# Altium PCB Copy of gateway2.PcbDoc
Units mil, origin at the board's own origin, x right, y up, seen from the top; angles counter-clockwise.
Board outline 6000 x 4000 mil, 2 copper layers (Top Layer, Bottom Layer); 21 components, 59 nets, 200 pads, 23 vias.
Unrouted connection lines stored in the file: 15.
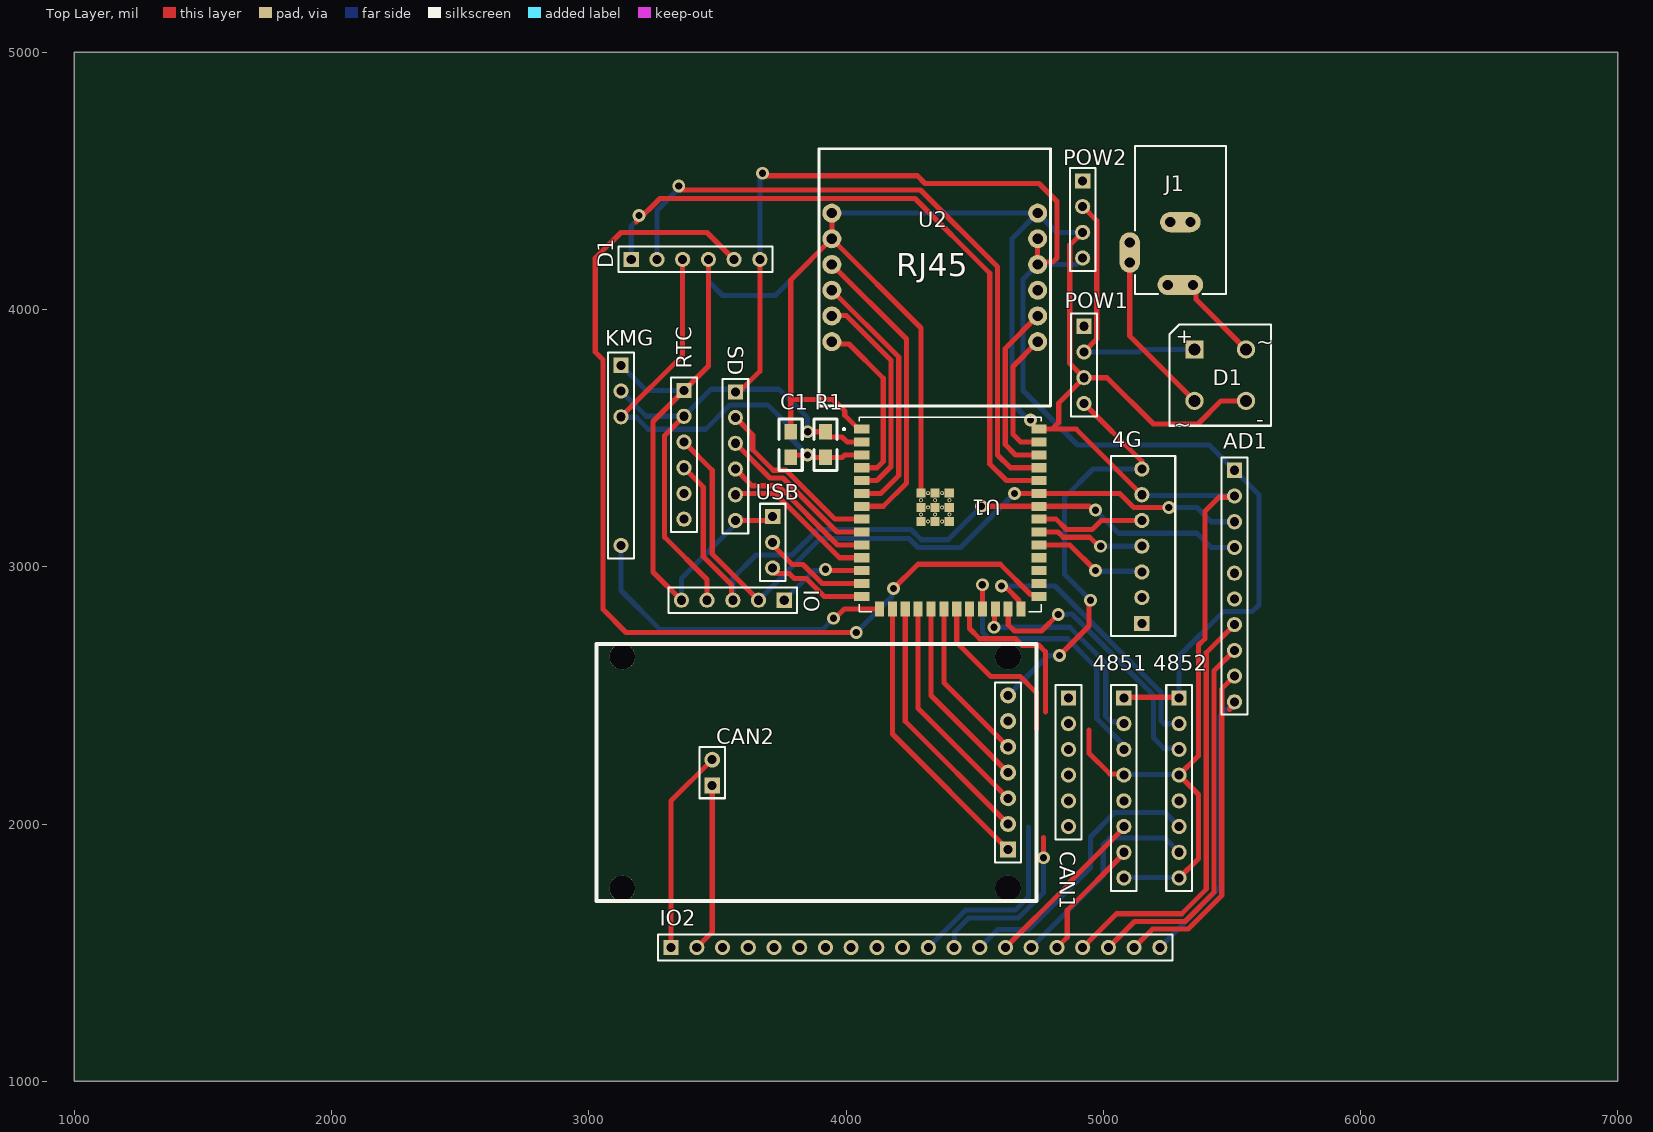
[diagram p0: Top Layer view]
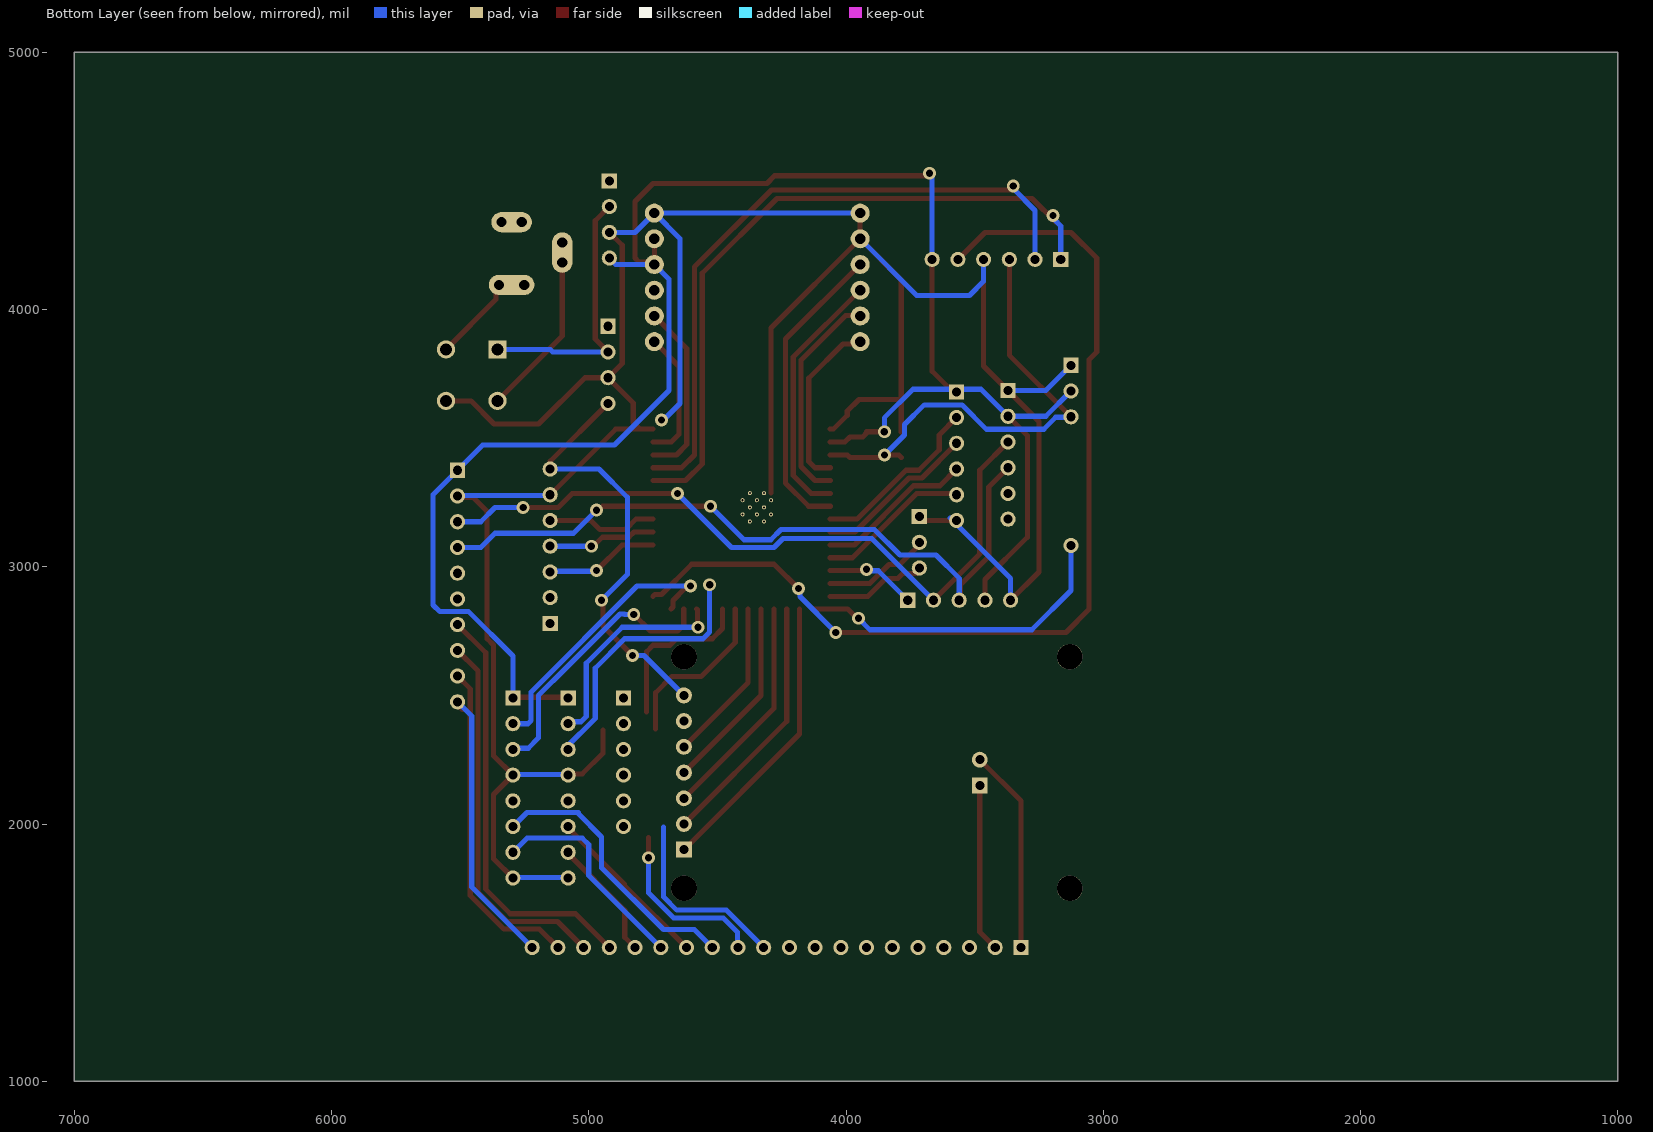
[diagram p1: Bottom Layer view, seen from below]

## Layer stack, top to bottom
Top Solder: solder mask 0.4, Solder Resist, Dk 3.5
Top Layer: signal copper 1.4
Dielectric 1: dielectric 12.6, FR-4, Dk 4.8
Bottom Layer: signal copper 1.4
Bottom Solder: solder mask 0.4, Solder Resist, Dk 3.5

## Board outline
1000,1000 7000,1000 7000,5000 1000,5000

## Design rules (kind name [scope] priority, off if disabled: settings)
Clearance [All] p1: gap=10 ignorepadtopadclearanceinfootprint=FALSE except(0: Arc-Hole Track-Hole SMDPad-Hole THPad-Hole Via-Hole Fill-Hole Poly-Hole Region-Hole Text-Hole)
PolygonConnect [All] p1: connectstyle=Relief reliefconductorwidth=10 reliefentries=4 polygonreliefangle="90 Angle" airgapwidth=10
RoutingVias [All] p1: holewidth=28 width=50 viastyle="Through Hole" minholewidth=28 minwidth=50 maxholewidth=28 maxwidth=50
SolderMaskExpansion [All] p1: expansion=4 istentingtop=FALSE
Width [All] p1: maxlimit=20 minlimit=20 preferedwidth=20
30 further rules are at their usual default settings.

## Components (designator, comment, footprint, x,y, rotation, side; value= is the part's Value field where it differs from the comment)
4G "DS1307模块" DS1307 5150,2780 r90 top
4851 "Header 8" HDR1X8 5080,2490 r270 top
4852 "Header 8" HDR1X8 5295,2490 r270 top
AD1 "Header 10" HDR1X10 5510,3375 r270 top
C1 "100pf" 0805 3785,3525 r90 top value=100pF
CAN1 "2.54DIP6" HDR1X6 4865,2490 r270 top
CAN2 "Can-BUs Module" CAN模块 3870,2280 r270 top
D1 "2.54DIP6" HDR1X6 3165,4195 r0 top
D1 "整流全桥-插" D-38 5455,3745 r0 top
IO "Header 5" HDR1X5 3760,2870 r180 top
IO2 "Header 20" HDR1X20 3320,1520 r0 top
J1 "PWR2.5" KLD-0202 5300,4635 r270 top
KMG "Header 8" KMG 3125,3425 r270 top
POW1 "Header 4" HDR1X4 4925,3935 r270 top
POW2 "Header 4" HDR1X4 4920,4500 r270 top
R1 "10K" 0805 3920,3525 r90 top
RTC "2.54DIP6" HDR1X6 3370,3685 r270 top
SD "Header 6" HDR1X6 3570,3680 r270 top
U1 "ESP32-S3-WROOM-1U" ESP32-S3-WROOM-1U 4345.51,3228.9 r0 top
U2 "W5500" W5500 2665,4010 r0 top
USB "Header 3" HDR1X3 3715,3195 r270 top

## Footprints (in the part's own frame and the unit in brackets; to place one, negate y for a bottom-side part, rotate by r counter-clockwise, add the part's x,y. Pads: shape width x height; smd on the part's side, far side on the other; paste and mask are expansions set on the pad)
0805 [mil]
  rect 60x50 smd: 1(0,0) 2(-100,0)
  silkscreen extent -150,-45 50,45
CAN模块 [mil]
  rect 62x62 hole 35 paste+0 mask+4: 1(380,760) 8(130,-390)
  round 62 hole 35 paste+0 mask+4: 2(280,760) 3(180,760) 4(80,760) 5(-20,760) 6(-120,760) 7(-220,760) 9(30,-390)
  round 100 hole 100 unplated paste+0: ""(-370,760) ""(-370,-740) ""(530,760) ""(530,-740)
  silkscreen extent -420,-840 580,870
D-38 [mm] "Bridge Rectifier; 4 Terminals; Body 9.4 x 9.4 mm (typ); Pitch 5.08 mm"
  rect 1.8x1.8 hole 1.2: 1(-2.54,2.54)
  round 1.8 hole 1.2: 2(-2.54,-2.54) 3(2.54,-2.54) 4(2.54,2.54)
  silkscreen extent -5,-5 5,5, body extent -5,-5 5,5, height 9.91
DS1307 [mm] "Connector; Header; 7 Position"
  rect 1.5x1.5 hole 0.9: 1(0,0)
  round 1.5 hole 0.9: 2(2.54,0) 3(5.08,0) 4(7.62,0) 5(10.16,0) 6(12.7,0) 7(15.24,0)
  silkscreen extent -1.27,-3.3 16.51,3.05
ESP32-S3-WROOM-1U [mm]
  rect 1.5x0.9 smd: 1(-7.226,7.775) 2(-7.226,6.505) 3(-7.226,5.235) 4(-7.226,3.965) 5(-7.226,2.695) 6(-7.226,1.425) 7(-7.226,0.155) 8(-7.226,-1.115) 9(-7.226,-2.385) 10(-7.226,-3.655) 11(-7.226,-4.925) 12(-7.226,-6.195) 13(-7.226,-7.465) 14(-7.226,-8.735) 27(10.274,-8.735) 28(10.274,-7.465) 29(10.274,-6.195) 30(10.274,-4.925) 31(10.274,-3.655) 32(10.274,-2.385) 33(10.274,-1.115) 34(10.274,0.155) 35(10.274,1.425) 36(10.274,2.695) 37(10.274,3.965) 38(10.274,5.235) 39(10.274,6.505) 40(10.274,7.775)
  rect 0.9x1.5 smd: 15(-5.461,-9.985) 16(-4.191,-9.985) 17(-2.921,-9.985) 18(-1.651,-9.985) 19(-0.381,-9.985) 20(0.889,-9.985) 21(2.159,-9.985) 22(3.429,-9.985) 23(4.699,-9.985) 24(5.969,-9.985) 25(7.239,-9.985) 26(8.509,-9.985)
  rect 0.9x0.9 smd: 41_1(-1.376,1.455) 41_2(0.024,1.455) 41_3(1.424,1.455) 41_4(-1.376,0.055) 41_5(0.024,0.055) 41_6(1.424,0.055) 41_7(-1.376,-1.345) 41_8(0.024,-1.345) 41_9(1.424,-1.345)
  round 0.4 hole 0.2 mask+0: 41_10(-0.676,1.455) 41_11(0.724,1.455) 41_12(-1.376,0.755) 41_13(0.024,0.755) 41_14(1.424,0.755) 41_15(-0.676,0.055) 41_16(0.724,0.055) 41_17(-1.376,-0.645) 41_18(0.024,-0.645) 41_19(1.424,-0.645) 41_20(-0.676,-1.345) 41_21(0.724,-1.345)
  silkscreen extent -9.08,-10.24 10.52,8.96
HDR1X3 [mm] "Connector; Header; 3 Position"
  rect 1.5x1.5 hole 0.9: 1(0,0)
  round 1.5 hole 0.9: 2(2.54,0) 3(5.08,0)
  silkscreen extent -1.27,-1.27 6.35,1.27
HDR1X4 [mm] "Connector; Header; 4 Position"
  rect 1.5x1.5 hole 0.9: 1(0,0)
  round 1.5 hole 0.9: 2(2.54,0) 3(5.08,0) 4(7.62,0)
  silkscreen extent -1.27,-1.27 8.89,1.27
HDR1X5 [mm] "Connector; Header; 5 Position"
  rect 1.5x1.5 hole 0.9: 1(0,0)
  round 1.5 hole 0.9: 2(2.54,0) 3(5.08,0) 4(7.62,0) 5(10.16,0)
  silkscreen extent -1.27,-1.27 11.43,1.27
HDR1X6 [mm] "Connector; Header; 6 Position"
  rect 1.5x1.5 hole 0.9: 1(0,0)
  round 1.5 hole 0.9: 2(2.54,0) 3(5.08,0) 4(7.62,0) 5(10.16,0) 6(12.7,0)
  silkscreen extent -1.27,-1.27 13.97,1.27
HDR1X8 [mm] "Connector; Header; 8 Position"
  rect 1.5x1.5 hole 0.9: 1(0,0)
  round 1.5 hole 0.9: 2(2.54,0) 3(5.08,0) 4(7.62,0) 5(10.16,0) 6(12.7,0) 7(15.24,0) 8(17.78,0)
  silkscreen extent -1.27,-1.27 19.05,1.27
HDR1X10 [mm] "Connector; Header; 10 Position"
  rect 1.5x1.5 hole 0.9: 1(0,0)
  round 1.5 hole 0.9: 2(2.54,0) 3(5.08,0) 4(7.62,0) 5(10.16,0) 6(12.7,0) 7(15.24,0) 8(17.78,0) 9(20.32,0) 10(22.86,0)
  silkscreen extent -1.27,-1.27 24.13,1.27
HDR1X20 [mm] "Connector; Header; 20 Position"
  rect 1.5x1.5 hole 0.9: 1(0,0)
  round 1.5 hole 0.9: 2(2.54,0) 3(5.08,0) 4(7.62,0) 5(10.16,0) 6(12.7,0) 7(15.24,0) 8(17.78,0) 9(20.32,0) 10(22.86,0) 11(25.4,0) 12(27.94,0) 13(30.48,0) 14(33.02,0) 15(35.56,0) 16(38.1,0) 17(40.64,0) 18(43.18,0) 19(45.72,0) 20(48.26,0)
  silkscreen extent -1.27,-1.27 49.53,1.27
KLD-0202 [mm] "DC Power Jack, 2.5mm, KLD Series, PCB Mount"
  oval 2x4.5 all layers, no hole: 1(13.7,0)
  round 1.5 hole 1: 1A(13.7,-1.25) 1B(13.7,1.25) 2A(7.5,-1) 2B(7.5,1) 3A(9.5,-5) 3B(11.5,-5)
  oval 2x4 all layers, no hole: 2(7.5,0)
  oval 4x2 all layers, no hole: 3(10.5,-5)
  silkscreen extent 0,-4.5 14.6,4.5
KMG [mm]
  rect 1.5x1.5 hole 0.9: 1(-9.094,0.011)
  round 1.5 hole 0.9: 2(-6.554,0.011) 3(-4.014,0.011) 8(8.686,0.011)
  silkscreen extent -10.36,-1.26 9.96,1.28
W5500 [mil]
  round 74 hole 40 paste+0 mask+2: 1(1280,365) 2(1280,265) 3(1280,165) 4(1280,65) 5(1280,-35) 6(1280,-135) 7(2080,-135) 8(2080,-35) 9(2080,65) 10(2080,165) 11(2080,265) 12(2080,365)
  silkscreen extent 1230,-385 2130,615

## Part data
4G: library part "Header 7", "Header, 7-Pin", LatestRevisionDate=17-Jul-2002, LatestRevisionNote="Re-released for DXP Platform.", Publisher="Altium Limited"
4851 4852 KMG: "Header, 8-Pin", LatestRevisionDate=17-Jul-2002, LatestRevisionNote="Re-released for DXP Platform.", Publisher="Altium Limited"
AD1: "Header, 10-Pin", LatestRevisionDate=17-Jul-2002, LatestRevisionNote="Re-released for DXP Platform.", Publisher="Altium Limited"
C1: library part "Cap Semi", "Capacitor (Semiconductor SIM Model)", LatestRevisionDate=29-May-2009, LatestRevisionNote="IPC-7351 Footprint Added.", PackageDescription="Chip Capacitor", PackageReference=C1206, Published=8-Jun-2000, Publisher="Altium Limited"
CAN1 D1 RTC: library part "Header 6", "Header, 6-Pin", LatestRevisionDate=17-Jul-2002, LatestRevisionNote="Re-released for DXP Platform.", Publisher="Altium Limited"
D1: library part Bridge1, "Full Wave Diode Bridge", DatasheetVersion=E2732B, LatestRevisionDate=29-May-2009, LatestRevisionNote="Sch pins A & K swapped.", PackageDescription="Bridge Rectifier; 4 Terminals; Body 9.4 x 9.4 mm (typ); Pitch 5.08 mm", PackageReference=D-38, Published=8-Jun-2000, Publisher="Altium Limited"
IO: "Header, 5-Pin", LatestRevisionDate=17-Jul-2002, LatestRevisionNote="Re-released for DXP Platform.", Publisher="Altium Limited"
IO2: "Header, 20-Pin", LatestRevisionDate=17-Jul-2002, LatestRevisionNote="Re-released for DXP Platform.", Publisher="Altium Limited"
J1: "Low Voltage Power Supply Connector", ComponentLink1Description="Manufacturer Link", ComponentLink1URL=http://domino.kycon.com/internet/Products.html, DatasheetDocument=09-May-2002, Published=17-Dec-2003, Publisher="Altium Limited"
POW1 POW2: "Header, 4-Pin", LatestRevisionDate=17-Jul-2002, LatestRevisionNote="Re-released for DXP Platform.", Publisher="Altium Limited"
R1: library part Res3, "Resistor", LatestRevisionDate=29-May-2009, LatestRevisionNote="IPC-7351 Footprint Added.", PackageDescription="Chip Resistor", PackageReference=J1-0603, Published=8-Jun-2000, Publisher="Altium Limited"
SD: "Header, 6-Pin", LatestRevisionDate=17-Jul-2002, LatestRevisionNote="Re-released for DXP Platform.", Publisher="Altium Limited"
U1: "2.4 GHz Wi-Fi (802.11 b/g/n) and Bluetooth 5 (LE) module", Package=Package, Availability="Not in stock", Check_prices=https://www.snapeda.com/parts/ESP32-S3-WROOM-1U/Espressif+Systems/view-part/?ref=eda, MF="Espressif Systems", MP=ESP32-S3-WROOM-1U, Price=None, SnapEDA_Link=https://www.snapeda.com/parts/ESP32-S3-WROOM-1U/Espressif+Systems/view-part/?ref=snap
USB: "Header, 3-Pin", LatestRevisionDate=17-Jul-2002, LatestRevisionNote="Re-released for DXP Platform.", Publisher="Altium Limited"
CAN2: Contributor=RPRCircuits, spicePre=U, spiceSymbolName="Can-BUs Module"

## Via types
v1: diameter 50, hole 28, Top Layer to Bottom Layer, 23 vias

## Nets (pads, with @x,y where several pads share a name; then routed paths per layer and width w, separated by ;. In a path a pad name is that pad's centre, name@x,y a point inside that pad or via, vN(x,y) a via of type N, cw(c..) or ccw(c..) an arc to the next point about the centre after c; other vN are vias at no path point)
4GRST: 4G.3 U1.31 | length 443.5
  Top Layer w20: U1.31 4870,3085 v1(4970,2985)
  Bottom Layer w20: v1(4970,2985) 4972.5,2982.5 5147.5,2982.5 4G.3
4GRXD: 4G.4 U1.32 | length 422.8
  Top Layer w20: U1.32 4824.57,3135 4844.57,3115 4947.22,3115 4982.22,3080 v1(4990,3080)
  Bottom Layer w20: v1(4990,3080) 4G.4
4GTXD: 4G.5 U1.33 | length 431.1
  Top Layer w20: U1.33 4817,3185 4857,3145 4957,3145 4992,3180 4G.5
12V+: D1.4@5555,3845 J1.1 J1.1A J1.1B | length 474.2
  Top Layer w20: J1.1 5333.32,4095.63 5360.45,4068.5 5360.45,4039.55 D1.4@5555,3845
  Bottom Layer w20: J1.1A J1.1 J1.1B
12V-: D1.2@5355,3645 J1.3 J1.3A J1.3B | length 720.3
  Top Layer w20: J1.3A J1.3 5103.15,4201.85 J1.3B 5103.15,3896.85 D1.2@5355,3645
A0: AD1.7 IO2.17 | length 1648.1
  Top Layer w20: IO2.17 5051.21,1651.21 5305,1651.21 5400.47,1746.69 5400.47,2665.47 AD1.7
A1: AD1.8 IO2.18 | length 1472.9
  Top Layer w20: IO2.18 5121.21,1621.21 5317.43,1621.21 5430.47,1734.26 5430.47,2595.47 AD1.8
A2: AD1.9 IO2.19 | length 1297.8
  Top Layer w20: IO2.19 5191.21,1591.21 5329.85,1591.21 5460.47,1721.83 5460.47,2525.47 AD1.9
A3: AD1.10 IO2.20 | length 1113.3
  Top Layer w20: 5490.47,2444.9 5510,2464.43 AD1.10
  Bottom Layer w20: IO2.20 5455,1755 5455,2420 AD1.10
ADDR: AD1.5
ALART: AD1.6
CAN0-CS: CAN2.5 U1.20 | length 639.1
  Top Layer w20: U1.20 4380.51,2549.49 CAN2.5
CAN0-INT: CAN2.1 U1.16 | length 1122
  Top Layer w20: U1.16 4180.51,2349.49 CAN2.1
CAN0_MISO: CAN2.4 U1.19 | length 759.8
  Top Layer w20: U1.19 4330.51,2499.49 CAN2.4
CAN0_MOSI: CAN2.3 U1.18 | length 880.6
  Top Layer w20: U1.18 4280.51,2449.49 CAN2.3
CAN0_SCK: CAN2.2 U1.17 | length 1001.3
  Top Layer w20: U1.17 4230.51,2399.49 CAN2.2
CANH1: CAN1.5 IO2.11 | length 742.6
  Bottom Layer w20: IO2.11 4465,1665 4657.57,1665 4708.79,1716.21 4708.79,1988.79
CANH2: CAN2.9 IO2.1 | length 796.3
  Top Layer w20: IO2.1 3320,2090 CAN2.9
CANL1: CAN1.6 IO2.12 | length 685
  Top Layer w20: v1(4768,1869) 4768,1948
  Bottom Layer w20: IO2.12 4421.95,1521.95 4421.95,1579.53 4477.43,1635 4670,1635 4768,1733 v1(4768,1869)
CANL2: CAN2.8 IO2.2 | length 654.9
  Top Layer w20: IO2.2 3480,1580 CAN2.8
CLK: RTC.6
CRX1: CAN1.4 U1.21 | length 660.8
  Top Layer w20: U1.21 4430.51,2705.49 4563,2573 4677,2573 4740,2510 4740,2370
CTX1: CAN1.3 U1.22 | length 642.9
  Top Layer w20: U1.22 4480.51,2759.49 4520,2720 4658.99,2720 4683.99,2695 4750,2695 4775,2670 4775,2435
DTR: 4G.1
EN: C1.2 D1.3@3365,4195 KMG.3 R1.2 U1.3 | length 1873.5
  Top Layer w20: KMG.3 3365,3822.61 D1.3@3365,4195 ; C1.2 3795,3435 v1(3850,3435) ; v1@3860,3425 3985,3425 3995,3435 U1.3
  Bottom Layer w20: KMG.3 3127.38,3581.08 3184.95,3581.08 3231.51,3534.53 3454.49,3534.53 3549.49,3629.53 3695.47,3629.53 3772.48,3552.52 3772.48,3512.52 v1(3850,3435)
FeedWatchdogPin: KMG.8 U1.15 | length 1277.2
  Top Layer w20: v1(3951.92,2799.64) 3957.4,2799.64 3993.55,2835.79 U1.15
  Bottom Layer w20: KMG.8 3125.42,2907.58 3278,2755 3907.28,2755 v1(3951.92,2799.64)
GND: 4G.6 4851.4 4851.8 4852.4 4852.8 AD1.2 C1.1 CAN1.2 CAN2.6 D1.3@5555,3645 D1.4@3465,4195 IO.5 KMG.1 POW1.3 POW2.3 RTC.1 SD.6 U1.1 U1.40 U1.41_1 U1.41_2 U1.41_3 U1.41_4 U1.41_5 U1.41_6 U1.41_7 U1.41_8 U1.41_9 U2.1 U2.2 U2.12 USB.1 | length 12090.9
  Top Layer w20: IO.5 3250,2980 3250,3565 RTC.1 3465,3780 D1.4@3465,4195 ; SD.6 USB.1@3720,3180 ; C1.1 3785,3650 ; U2.1 U2.2 ; U1.1 4049.21,3535 3995,3589.21 3995,3605 3950,3650 3785,3650 ; U1.41_1 4291.34,3928.66 U2.2 ; U1.40 4800,3535 ; POW2.3 4870,4250 4870,3790 POW1.3 ; 4945,2365 4945,2275 5025,2195 4851.4@5090,2195 ; 4G.6 4895,3535 4800,3535 ; 4852.8 5370,1865 5370,2115 4852.4 5370.47,2265.47 5370.47,2695.47 5395,2720 5395,3215 5450.47,3270.47 5505.47,3270.47 AD1.2 ; D1.3@5555,3645 5458.12,3645 5368.12,3555 5195,3555 5015,3735 POW1.3 ; 3785,3650 3785,4115 U2.2 ; 4800,3535 4827,3562 4827,3637 POW1.3
  Bottom Layer w20: KMG.1 3223.46,3685 RTC.1 ; IO.5 3360,2955 SD.6@3595,3190 ; D1.4@3465,4195 3465,4110 3520,4055 3725,4055 U2.2 ; U2.1 U2.12 ; v1@4725,3570 4710,3570 4645,3635 4645,4275 U2.12 ; POW2.3 4820,4300 U2.12 ; 4851.4@5090,2195 5092.5,2192.5 5292.5,2192.5 4852.4 ; 4851.8@5092.5,1797.5 5090,1795 5092.5,1792.5 5292.5,1792.5 4852.8 ; 4G.6 5152.5,3277.5 5507.5,3277.5 AD1.2
  other v1: 4717.5,3570
I2C_SCL: AD1.3 IO.2 RTC.3 U1.35 | length 2831.6
  Top Layer w20: RTC.3 3480,3375 3480,3050 IO.2 ; v1(4655,3285) U1.35 5064,3285 5119,3230 v1(5255,3230)
  Bottom Layer w20: IO.2 3900.04,3110 4245,3110 4280,3075 4445,3075 v1(4655,3285) ; v1(5255,3230) 5365,3230 5420,3175 AD1.3
I2C_SDA: AD1.4 IO.3 RTC.4 U1.34 | length 2844.1
  Top Layer w20: RTC.4 3445,3310 3445,3040 3555.47,2929.53 3555.47,2884.53 3560,2880 IO.3 ; v1(4527,3235) 4946.88,3235 4961.88,3220 v1(4970,3220)
  Bottom Layer w20: IO.3 3560,2955 3650.47,3045.47 3790.45,3045.47 3889.98,3145 4252.43,3145 4292.43,3105 4397,3105 v1(4527,3235) ; v1(4970,3220) 5059.53,3130.47 5364.53,3130.47 5420,3075 AD1.4
INT: RTC.5
IO0: D1.5 U1.27 | length 3910.8
  Top Layer w20: D1.5 3460,4300 3125,4300 3025,4200 3025,3835 3055,3805 3055,2835 3145,2745 v1(4040,2745) ; v1(4185,2915) 4280,3010 4599.47,3010 4716.76,2892.72 4742.28,2892.72 U1.27
  Bottom Layer w20: v1(4040,2745) 4179.26,2884.26 4179.26,2909.26 v1(4185,2915)
NET: 4G.2
NetJ1_2: J1.2 J1.2A J1.2B | length 78.7
  Bottom Layer w20: J1.2A J1.2 J1.2B
PCF8575INT: IO.1 U1.12 | length 352.8
  Top Layer w20: v1(3920,2990) 3925,2985 U1.12
  Bottom Layer w20: IO.1 3874.26,2984.26 3914.26,2984.26 v1(3920,2990)
POWERIN: D1.1@5355,3845 POW1.2 POW2.2 | length 1042.6
  Top Layer w20: POW2.2 4975,4345 4975,3885 POW1.2
  Bottom Layer w20: POW1.2 5140,3835 5150,3845 D1.1@5355,3845
RS485A1: 4851.6 IO2.14 | length 669.7
  Top Layer w20: IO2.14 4862,1762 4862,1767 4851.6@5090,1995
RS485A2: 4852.6 IO2.13 | length 1088.5
  Bottom Layer w20: IO2.13 4590,1590 4710,1590 4950,1830 4950,1950 5040,2040 5040,2045 5240,2045 4852.6
RS485B1: 4851.7 IO2.16 | length 486.8
  Top Layer w20: IO2.16 4860,1560 4860,1665 4851.7@5090,1895
RS485B2: 4852.7 IO2.15 | length 844.1
  Bottom Layer w20: IO2.15 5000,1800 5000,1920 5025,1945 5240,1945 4852.7
RX1: 4851.3 U1.23 | length 1139.8
  Top Layer w20: v1(4530,2930) 4530.26,2929.74 4530.26,2836.04 U1.23
  Bottom Layer w20: v1(4530,2930) 4530,2746.36 4556.36,2720 4860.86,2720 4975,2605.86 4975,2410 4851.3@5090,2295
RX2: 4852.3 U1.25 | length 1083.5
  Top Layer w20: U1.25 4630.51,2774.49 4655,2750 4760,2750 v1(4825,2815)
  Bottom Layer w20: v1@4820,2815 v1(4825,2815) 4860,2815 4861.72,2816.72 4878.28,2816.72 5139.53,2555.47 5139.67,2555.47 5195,2500.15 5195,2335 5235.47,2294.53 5290.47,2294.53 4852.3
RXD0: D1.1@3165,4195 U1.36 | length 2656.9
  Top Layer w20: 3185,4340 3277,4432 4268,4432 4559,4141 4559,3400 4624,3335 U1.36
  Bottom Layer w20: D1.1@3165,4195 3165,4325 v1@3190,4350
  other v1: 3195,4365
SD_CLK: SD.4 U1.10 | length 613.2
  Top Layer w20: SD.4 3635,3315 3737.43,3315 3967.43,3085 U1.10
SD_CS: SD.2 U1.8 | length 688.4
  Top Layer w20: SD.2 3637.5,3512.5 3637.5,3454.93 3717.43,3375 3767.28,3375 3957.28,3185 U1.8
SD_MISO: SD.5 U1.11 | length 596.6
  Top Layer w20: SD.5 3575,3285 3725,3285 3975,3035 U1.11
SD_MOSI: SD.3 U1.9 | length 633.9
  Top Layer w20: SD.3 3705,3345 3754.85,3345 3964.85,3135 U1.9
TX1: 4851.2 U1.24 | length 858.3
  Top Layer w20: v1(4575,2765) 4577.76,2767.76 4577.76,2833.03 U1.24
  Bottom Layer w20: v1(4575,2765) 4870,2765 5010,2625 5010,2417.9 5030.43,2397.47 5072.53,2397.47 4851.2 ; 4851.2@5087.5,2397.5 4851.2@5090,2395
TX2: 4852.2 U1.26 | length 1104
  Top Layer w20: v1(4605,2925) 4610.74,2919.26 4622.57,2919.26 4672.8,2869.03 4672.8,2843.5 U1.26
  Bottom Layer w20: v1(4605,2925) 4812.57,2925 5225,2512.57 5225,2401.72 5236.72,2390 4852.2
TXD0: D1.2@3265,4195 U1.37 | length 2580.8
  Top Layer w20: v1@3355,4465 4290,4465 4589,4166 4589,3435 4639,3385 U1.37
  Bottom Layer w20: D1.2@3265,4195 3265,4385 v1@3350,4470
  other v1: 3350,4480
USB_D+: U1.13 USB.2 | length 401.1
  Top Layer w20: USB.2@3720,3080 3790.65,3009.35 3833.07,3009.35 3896.24,2946.18 3907.43,2935 U1.13
USB_D-: U1.14 USB.3 | length 380.4
  Top Layer w20: USB.3@3720,2980 3726.67,2973.33 3779.53,2973.33 3797.86,2955 3845,2955 3915,2885 U1.14
VCC50: 4G.7 CAN2.7 POW1.4 | length 1664.1
  Top Layer w20: v1(4830,2655) 4945,2770 4945,2865 v1(4950,2870) ; POW1.4 5150,3410 4G.7
  Bottom Layer w20: CAN2.7 4785,2655 v1(4830,2655) ; v1(4950,2870) 4850,2970 4850,3270 4960,3380 4G.7
VDD33: 4851.1 4852.1 AD1.1 CAN1.1 D1.6 IO.4 KMG.2 POW2.4 R1.1 RTC.2 SD.1 U1.2 U2.10 U2.11 | length 7394.1
  Top Layer w20: RTC.2 3295,3510 3295,3115 3460,2950 IO.4 ; SD.1@3595,3690 3665,3760 D1.6 ; v1@3670,4520 4277.43,4520 4307.43,4490 4750,4490 4820,4420 4820,4200 4805.33,4185.33 4755.33,4185.33 U2.10 U2.11 ; v1(3851,3525) R1.1 3920,3520 3935,3505 3985,3505 4005,3485 U1.2 ; 4851.1@5092.5,2492.5 5292.5,2492.5 4852.1
  Bottom Layer w20: KMG.2 3223.46,3585 RTC.2 ; RTC.2@3377.47,3577.53 RTC.2 ; D1.6 3665,4515 v1@3670,4520 ; v1(3851,3525) 3851,3579 3740,3690 3475,3690 RTC.2 ; POW2.4 4895,4175 U2.10 4688,4118 4688,3685 4900,3473 5412,3473 AD1.1 5605,3280 5605,2851.72 5578.76,2825.47 5469.53,2825.47 5468.28,2826.72 5295,2653.43 4852.1
  other v1: 3675,4530
W_CLK: U1.6 U2.4 | length 1000.7
  Top Layer w20: U2.4 4205,3815 4205,3355 4135,3285 U1.6
W_CS: U1.5 U2.5 | length 852.1
  Top Layer w20: U2.5 3946.29,3976.29 4001.29,3976.29 4175,3802.57 4175,3389.45 4120.55,3335 U1.5
W_INT: U1.4 U2.6 | length 676.2
  Top Layer w20: U2.6 3954.43,3865.57 4012,3865.57 4145,3732.57 4145,3409.45 4120.55,3385 U1.4
W_MISO: U1.39 U2.7 | length 513.2
  Top Layer w20: U2.7 4649,3779 4649,3515 4679,3485 U1.39
W_MOSI: U1.7 U2.3 | length 1181.4
  Top Layer w20: U2.3 4235,3885 4235,3325 4145,3235 U1.7
W_RST: U1.38 U2.8 | length 699.8
  Top Layer w20: U2.8 4619,3849 4619,3475 4659,3435 U1.38
pads on no net: 4851.5 4852.5 CAN2. IO2.3 IO2.4 IO2.5 IO2.6 IO2.7 IO2.8 IO2.9 IO2.10 POW1.1 POW2.1 U1.28 U1.29 U1.30 U1.41_10 U1.41_11 U1.41_12 U1.41_13 U1.41_14 U1.41_15 U1.41_16 U1.41_17 U1.41_18 U1.41_19 U1.41_20 U1.41_21 U2.9

## Silkscreen, mask and mechanical layers (free items; w line width, h text height)
Mechanical 2:
  drawing of 6755 lines, arcs and shapes, not listed

## Text inside footprints (layer, text, board x,y; h text height)
D1: Top Overlay "+" at 5281.38,3869.57 h59.06; Top Overlay "-" at 5595,3545 h59.05; Top Overlay "~" at 5275,3525 h59.05; Top Overlay "~" at 5595,3845 h59.05
U2: Top Overlay "RJ45" at 4195,4130 h90